# EAGLE board counterMeter (EAGLE 6.4)
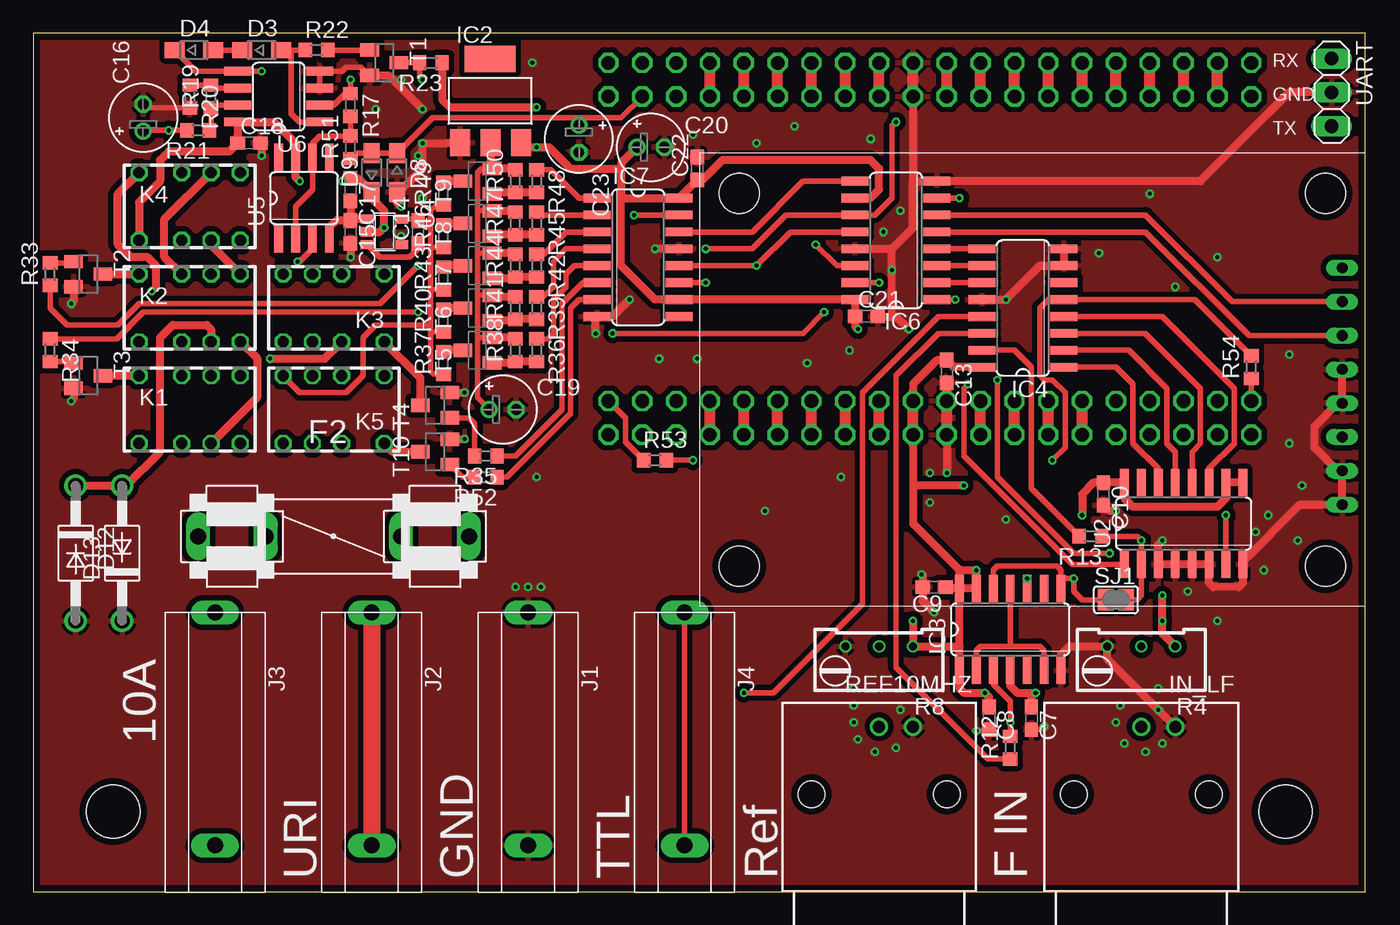
[diagram p0: board, top side]
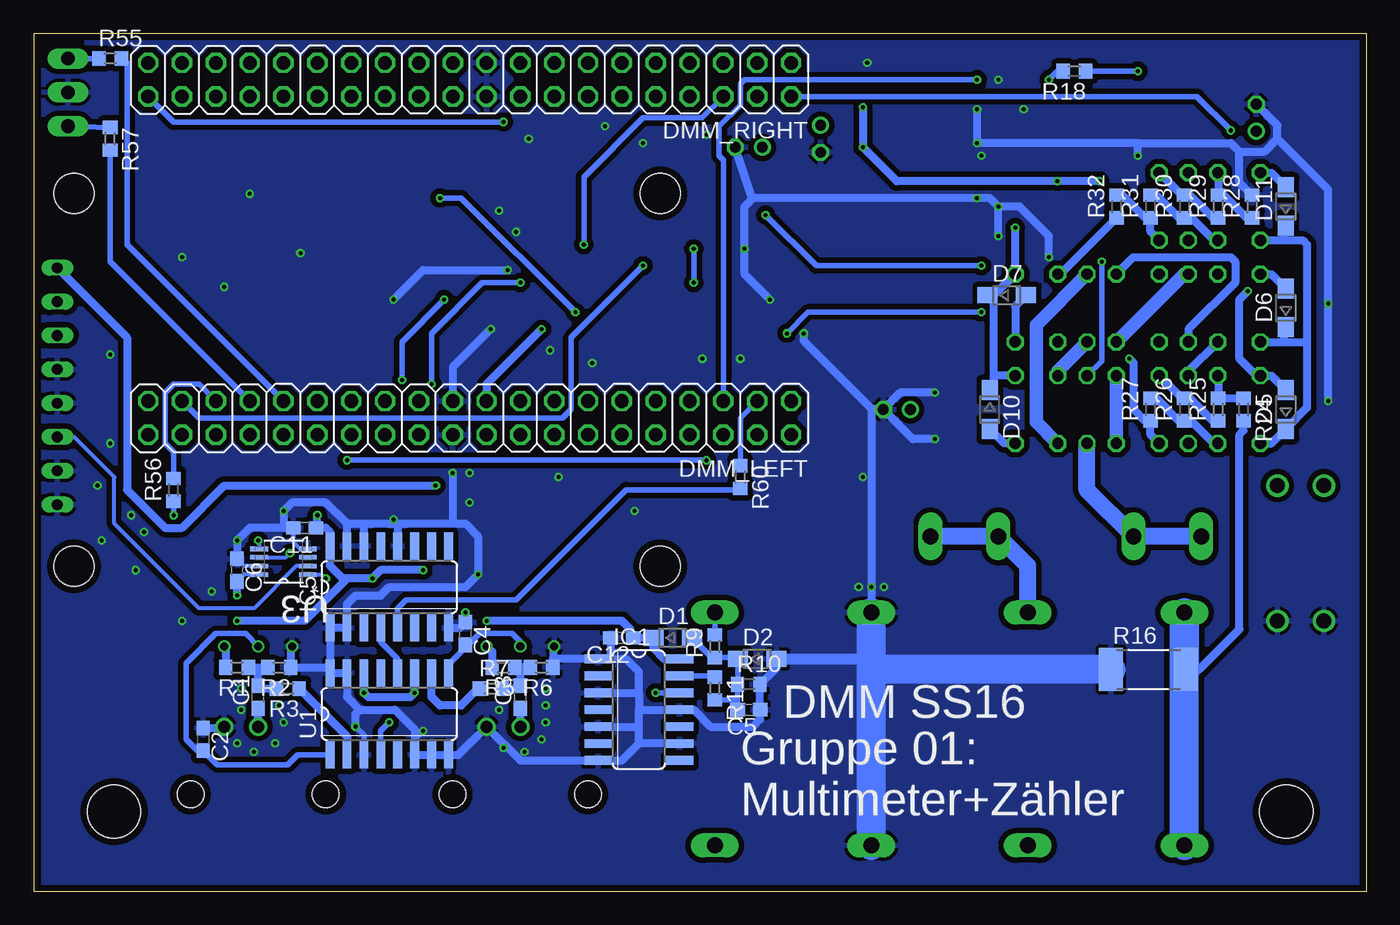
[diagram p1: board, bottom side, seen from below]

Size 100 x 64.44 mm. Coordinates in mm from the lower left corner, seen from the top.
Outline: 0,0 100,0 100,64.44 0,64.44 0,0
Copper layers (1*16): Top 0.035mm / dielectric 1.6mm / Bottom 0.035mm
Design rules "Elecrow_2-layer_PCB_eagle_rule": minimum track width 6mil, minimum drill 0.3mm, track to track 6mil, track to pad 6mil, pad to pad 6mil, via to via 8mil, smd to smd 0mil, copper to edge 20mil, drill to drill 10mil, minimum pad ring 6mil, minimum via ring 6mil, stop-mask expansion 0mil, vias tented up to drill 100mil, thermal gap 10mil
Holes 4 mm at 6,6 94,6

## Footprints (pad centres in the part's own frame; a part is rotated, then mirrored left to right if it is on the bottom)
C0603 = smd 1.1 x 1: 1 -0.85,0; 2 0.85,0
E2-5 = drill 0.813 pad 1.27: + -1.016,0 | drill 0.813 pad 1.27 octagon: - 1.016,0
SOD323-W = smd 1.5 x 1.2: A 1.45,0; C -1.45,0
DO41-10 = drill 1.118: A 5.08,0; C -5.08,0
2X20 = drill 1.016 octagon: 1 -24.13,-1.27; 2 -24.13,1.27; 3 -21.59,-1.27; 4 -21.59,1.27; 5 -19.05,-1.27; 6 -19.05,1.27; 7 -16.51,-1.27; 8 -16.51,1.27; 9 -13.97,-1.27; 10 -13.97,1.27; 11 -11.43,-1.27; 12 -11.43,1.27; 13 -8.89,-1.27; 14 -8.89,1.27; 15 -6.35,-1.27; 16 -6.35,1.27; 17 -3.81,-1.27; 18 -3.81,1.27; 19 -1.27,-1.27; 20 -1.27,1.27; 21 1.27,-1.27; 22 1.27,1.27; 23 3.81,-1.27; 24 3.81,1.27; 25 6.35,-1.27; 26 6.35,1.27; 27 8.89,-1.27; 28 8.89,1.27; 29 11.43,-1.27; 30 11.43,1.27; 31 13.97,-1.27; 32 13.97,1.27; 33 16.51,-1.27; 34 16.51,1.27; 35 19.05,-1.27; 36 19.05,1.27; 37 21.59,-1.27; 38 21.59,1.27; 39 24.13,-1.27; 40 24.13,1.27
FUSE1 = drill 1.194 long: 1A -10.16,0; 1B -5.08,0; 2A 10.16,0; 2B 5.08,0
SO14 = smd 0.66 x 2.032: 1 -3.81,-3.073; 2 -2.54,-3.073; 3 -1.27,-3.073; 4 0,-3.073; 5 1.27,-3.073; 6 2.54,-3.073; 7 3.81,-3.073; 8 3.81,3.073; 9 2.54,3.073; 10 1.27,3.073; 11 0,3.073; 12 -1.27,3.073; 13 -2.54,3.073; 14 -3.81,3.073
SOT223 = smd 1.499 x 2.007: 1 -2.261,-3.15; 2 0.025,-3.15; 3 2.311,-3.15 | smd 3.81 x 2.007: 4 0,3.15
SO16 = smd 0.66 x 2.032: 1 -4.445,-3.073; 2 -3.175,-3.073; 3 -1.905,-3.073; 4 -0.635,-3.073; 5 0.635,-3.073; 6 1.905,-3.073; 7 3.175,-3.073; 8 4.445,-3.073; 9 4.445,3.073; 10 3.175,3.073; 11 1.905,3.073; 12 0.635,3.073; 13 -0.635,3.073; 14 -1.905,3.073; 15 -3.175,3.073; 16 -4.445,3.073
AMP_227161 = drill 0.9 pad 1.27: 1 0,-5.08; 2 -2.54,-5.08 | hole 2: -5.08,0; 5.08,0
4MMJACK = drill 1.2 long: 1@1 0,0; 1@2 17.5,0
G6K-2P-Y = drill 0.85 octagon: 1 0,-2.54; 2 3.2,-2.54; 3 5.4,-2.54; 4 7.6,-2.54; 5 7.6,2.54; 6 5.4,2.54; 7 3.2,2.54; 8 0,2.54
HFFRONT = drill 0.8 long: DIVSEL1 48.26,22.86; DIVSEL2 48.26,20.32; GND1 48.26,17.78; GND2 48.26,15.24; GND3 48.26,10.16; GND4 48.26,7.62; OUT 48.26,12.7; VCC 48.26,25.4 | hole 3: 3,31; 3,3; 47,3; 47,31
R0603 = smd 1 x 1.1: 1 -0.85,0; 2 0.85,0
RTRIM64W = drill 0.61: 1 1.27,-2.54; 2 1.27,0; 3 1.27,2.54
R2512 = smd 1.8 x 3.2: 1 -2.8,0; 2 2.8,0
SJ = smd 1.168 x 1.6: 1 -0.762,0; 2 0.762,0
SOT23 = smd 1 x 1.4: 1 -0.95,-1.1; 2 0.95,-1.1; 3 0,1.1
SOT23-BEC = smd 1 x 1.4: B -0.95,-1.1; C 0,1.1; E 0.95,-1.1
SOIC16 = smd 0.66 x 2.032: 1 -4.445,-3.073; 2 -3.175,-3.073; 3 -1.905,-3.073; 4 -0.635,-3.073; 5 0.635,-3.073; 6 1.905,-3.073; 7 3.175,-3.073; 8 4.445,-3.073; 9 4.445,3.073; 10 3.175,3.073; 11 1.905,3.073; 12 0.635,3.073; 13 -0.635,3.073; 14 -1.905,3.073; 15 -3.175,3.073; 16 -4.445,3.073
SOP65P400X130-8N = smd 1.321 x 0.356: 1 -1.829,0.965; 2 -1.829,0.33; 3 -1.829,-0.33; 4 -1.829,-0.965; 5 1.829,-0.965; 6 1.829,-0.33; 7 1.829,0.33; 8 1.829,0.965
SOT23-5 = smd 0.69 x 0.99: 1 -0.95,-1.29; 2 0,-1.29; 3 0.95,-1.29; 4 0.95,1.3; 5 -0.95,1.3
SOIC8 = smd 0.66 x 2.032: 1 -1.905,-3.073; 2 -0.635,-3.073; 3 0.635,-3.073; 4 1.905,-3.073; 5 1.905,3.073; 6 0.635,3.073; 7 -0.635,3.073; 8 -1.905,3.073
1X03 = drill 1.016 long: 1 -2.54,0; 2 0,0; 3 2.54,0

## Placement (x,y rotation side)
C1  1µ  [C0603]  83.19,14.61 90 bottom
C2  1µ  [C0603]  87.31,11.43 270 bottom
C3  1µ  [C0603]  63.5,14.61 90 bottom
C4  1µ  [C0603]  67.63,19.37 270 bottom
C5  15p  [C0603]  46.35,13.65 180 bottom
C6  100n  [C0603]  84.77,24.13 270 bottom
C7  100n  [C0603]  74.93,13.02 270 top
C8  100n  [C0603]  71.75,13.02 270 top
C9  100n  [C0603]  67.63,22.86 180 top
C10  100n  [C0603]  80.33,29.84 270 top
C11  100n  [C0603]  79.69,27.3 180 bottom
C12  100n  [C0603]  55.88,19.05 180 bottom
C13  100n  [C0603]  68.58,39.05 270 top
C14  1µ  [C0603]  28.89,49.53 90 top
C15  1µ  [C0603]  23.81,49.53 270 top
C16  10µ  [E2-5]  8.26,58.1 90 top
C17  100n  [C0603]  23.81,52.7 270 top
C18  100n  [C0603]  16.19,56.2 0 top
C19  10µ  [E2-5]  35.24,36.2 0 top
C20  10µ  [E2-5]  46.35,55.88 0 top
C21  100n  [C0603]  62.55,43.18 0 top
C22  100n  [C0603]  49.85,54.29 90 top
C23  10µ  [E2-5]  40.96,56.52 270 top
D1  4148  [SOD323-W]  52.07,19.05 0 bottom
D2  4148  [SOD323-W]  45.72,17.46 0 bottom
D3  4148  [SOD323-W]  17.14,63.18 0 top
D4  4148  [SOD323-W]  12.06,63.18 0 top
D5  4148  [SOD323-W]  6.03,36.2 90 bottom
D6  4148  [SOD323-W]  6.03,43.81 90 bottom
D7  4148  [SOD323-W]  26.99,44.77 0 bottom
D8  4148  [SOD323-W]  27.3,53.98 270 top
D9  4148  [SOD323-W]  25.4,53.98 90 top
D10  4148  [SOD323-W]  28.26,36.2 270 bottom
D11  4148  [SOD323-W]  6.03,51.44 90 bottom
D12  1N4001  [DO41-10]  3.17,25.4 270 top
D13  1N4001  [DO41-10]  6.67,25.4 90 top
DMM_LEFT  [2X20]  67.31,35.56 180 bottom
DMM_RIGHT  [2X20]  67.31,60.96 180 bottom
F2  315mA  [FUSE1]  22.54,26.67 0 top
IC1  74AC14D  [SO14]  54.61,13.65 270 bottom
IC2  REG1117  [SOT223]  34.29,59.37 0 top
IC3  74AC74D  [SO14]  73.34,19.68 0 top
IC4  74HC151D  [SO16]  74.3,43.81 90 top
IC5  74AC390D  [SO16]  73.34,22.86 0 bottom
IC6  74HC595D  [SO16]  64.77,48.9 90 top
IC7  74HC595D  [SO16]  45.4,47.62 270 top
IN_LF  1-227161-6  [AMP_227161]  83.19,7.3 180 top
J1  COMMON  [4MMJACK]  37.15,20.95 270 top
J2  U/I/R  [4MMJACK]  25.4,20.95 270 top
J3  10A  [4MMJACK]  13.65,20.95 270 top
J4  U/I/R  [4MMJACK]  48.9,20.95 270 top
K1  G6K-2P-Y  [G6K-2P-Y]  7.94,36.2 0 top
K2  G6K-2P-Y  [G6K-2P-Y]  7.94,43.81 0 top
K3  G6K-2P-Y  [G6K-2P-Y]  26.35,43.81 180 top
K4  G6K-2P-Y  [G6K-2P-Y]  7.94,51.44 0 top
K5  G6K-2P-Y  [G6K-2P-Y]  26.35,36.2 180 top
PCB1  HFFRONT  [HFFRONT]  50.01,21.43 0 top
R1  100  [R0603]  84.77,16.83 180 bottom
R2  100  [R0603]  81.6,16.83 180 bottom
R3  330  [R0603]  80.96,15.24 180 bottom
R4  10k  [RTRIM64W]  83.19,17.14 90 top
R5  100  [R0603]  64.77,16.83 180 bottom
R6  100  [R0603]  61.91,16.83 180 bottom
R7  330  [R0603]  65.72,15.24 0 bottom
R8  10k  [RTRIM64W]  63.5,17.14 90 top
R9  10k  [R0603]  48.9,18.41 90 bottom
R10  1M  [R0603]  46.35,15.56 0 bottom
R11  330  [R0603]  48.9,15.24 270 bottom
R12  10k  [R0603]  73.34,10.79 90 top
R13  10k  [R0603]  79.38,26.67 180 top
R16  0.02  [R2512]  16.36,16.68 0 bottom
R17  10k  [R0603]  23.81,59.05 270 top
R18  10k  [R0603]  21.91,61.59 180 bottom
R19  140k  [R0603]  13.34,59.69 90 top
R20  10k  [R0603]  11.75,59.69 270 top
R21  10k  [R0603]  12.38,57.15 180 top
R22  1k  [R0603]  21.27,63.18 0 top
R23  10k  [R0603]  29.84,62.23 180 top
R24  1  [R0603]  9.21,36.2 270 bottom
R25  9  [R0603]  11.11,36.2 90 bottom
R26  90  [R0603]  13.65,36.2 90 bottom
R27  900  [R0603]  16.19,36.2 90 bottom
R28  4k  [R0603]  8.57,51.44 90 bottom
R29  6k  [R0603]  11.11,51.44 90 bottom
R30  90k  [R0603]  13.65,51.44 90 bottom
R31  900k  [R0603]  16.19,51.44 90 bottom
R32  9M  [R0603]  18.73,51.44 90 bottom
R33  10k  [R0603]  1.27,46.35 90 top
R34  10k  [R0603]  1.27,40.64 270 top
R35  10k  [R0603]  33.97,32.7 180 top
R36  1k  [R0603]  37.78,40.64 270 top
R37  100  [R0603]  30.8,39.69 90 top
R38  10k  [R0603]  36.2,40.64 90 top
R39  1k  [R0603]  37.78,43.81 270 top
R40  1k  [R0603]  30.8,42.86 90 top
R41  10k  [R0603]  36.2,43.81 90 top
R42  1k  [R0603]  37.78,46.99 270 top
R43  10k  [R0603]  30.8,46.04 90 top
R44  10k  [R0603]  36.2,46.99 90 top
R45  1k  [R0603]  37.78,50.16 270 top
R46  100k  [R0603]  30.8,49.21 90 top
R47  10k  [R0603]  36.2,50.16 90 top
R48  1k  [R0603]  37.78,53.34 270 top
R49  1M  [R0603]  30.8,52.39 90 top
R50  10k  [R0603]  36.2,53.34 90 top
R51  10k  [R0603]  23.81,55.88 90 top
R52  10k  [R0603]  33.97,31.11 180 top
R53  100  [R0603]  46.67,32.38 0 top
R54  100  [R0603]  91.44,39.37 90 top
R55  100  [R0603]  94.3,62.55 0 bottom
R56  100  [R0603]  89.53,30.16 90 bottom
R57  100  [R0603]  94.3,56.52 270 bottom
R60  100  [R0603]  46.99,31.11 270 bottom
REF10MHZ  1-227161-6  [AMP_227161]  63.5,7.3 180 top
SJ1  [SJ]  81.28,21.91 0 top
T1  BC847  [SOT23]  26.35,62.23 270 top
T2  BC847  [SOT23]  4.13,46.35 270 top
T3  BC847  [SOT23]  4.13,38.73 270 top
T4  BC847  [SOT23]  30.16,36.51 90 top
T5  BC857  [SOT23-BEC]  33.34,40.64 90 top
T6  BC857  [SOT23-BEC]  33.34,43.81 90 top
T7  BC857  [SOT23-BEC]  33.34,46.99 90 top
T8  BC857  [SOT23-BEC]  33.34,50.16 90 top
T9  BC857  [SOT23-BEC]  33.34,53.34 90 top
T10  BC847  [SOT23]  30.16,33.02 90 top
U1  MAX9201  [SOIC16]  73.34,13.34 0 bottom
U2  74XX161  [SOIC16]  86.36,27.62 0 top
U3  SN74LVC2G157DCTR  [SOP65P400X130-8N]  81.28,24.77 180 bottom
U4  MAX871  [SOT23-5]  26.35,49.53 270 top
U5  AD8638  [SOIC8]  20.32,52.07 0 top
U6  AD8539  [SOIC8]  18.41,59.69 90 top
UART  [1X03]  97.47,60.01 270 top

## Library data of the parts
C1-C23 = rcl
D1-D13 = diode
DMM_LEFT DMM_RIGHT UART = pinhead
F2 = special
IC1 IC3-IC7 = 74xx-eu
IC2 = burr-brown; MPN: REG1117; OC_FARNELL: 1097566; OC_NEWARK: 14P6981
IN_LF REF10MHZ = con-coax; MF: TYCO ELECTRONICS; MPN: 1-227161-6; OC_FARNELL: unknown; OC_NEWARK: 09H7854
J1-J4 PCB1 U1 U2 U4-U6 = dmm
K1-K5 = relay; MF: OMRON COMPONENTS USA; MPN: G6K-2P-Y DC12; OC_FARNELL: 3937276; OC_NEWARK: 34C3464
R1-R13 R16-R57 R60 = resistor
SJ1 = jumper
T1-T10 = transistor
U3 = dmm; MPN: SN74LVC2G157DCTR; OC_FARNELL: 1287414; OC_NEWARK: 76C4205; PACKAGE: SOP-8; SUPPLIER: Texas Instruments

## Nets
+3V3: C19.+ IC2.2 R38.2 R41.2 R44.2 R47.2 R50.2 T5.E T6.E T7.E T8.E T9.E
-5V: C15.1 C17.2 U4.1 U5.4
AREF: DMM_RIGHT.17 DMM_RIGHT.18
AVCC: DMM_RIGHT.21 DMM_RIGHT.22
CNT_EN: R56.1 U2.7
CNT_IN: R13.1 SJ1.2 U2.2 U3.5
CNT_IN_: IC4.15 R13.2
CNT_OUT: IC4.5 R53.2 R54.2
CNT_RES: IC6.15 U2.1
DIVSEL1: IC4.11 IC6.2
DIVSEL2: IC4.10 IC6.3
DIVSEL3: IC4.9 IC6.4
GND: C2.1 C4.1 C5.1 C6.1 C7.2 C8.2 C9.2 C10.2 C11.2 C12.2 C13.2 C15.2 C16.- C18.2 C19.- C20.- C21.2 C22.2 C23.- D2.A D8.A D12.A D13.C DMM_LEFT.21 DMM_LEFT.22 DMM_RIGHT.19 DMM_RIGHT.20 IC1.1 IC1.3 IC1.5 IC1.7 IC1.9 IC1.11 IC2.1 IC3.7 IC4.7 IC4.8 IC4.12 IC5.1 IC5.2 IC5.8 IC5.12 IC5.14 IC5.15 IC6.8 IC6.13 IC7.8 IC7.13 IN_LF.2 J1.1@1 J1.1@2 PCB1.GND1 PCB1.GND2 PCB1.GND3 PCB1.GND4 R2.1 R4.3 R6.1 R8.3 R10.2 R16.1 R20.2 R28.2 REF10MHZ.2 T1.2 T2.2 T3.2 T4.2 T10.2 U1.3 U1.6 U1.7 U1.8 U1.15 U1.16 U2.3 U2.4 U2.5 U2.6 U2.8 U3.4 U3.7 U4.4 U6.3 U6.4 UART.2
HF: PCB1.OUT U3.2
HFSEL1: IC6.6 PCB1.DIVSEL1
HFSEL2: IC6.5 PCB1.DIVSEL2
I_10A: J3.1@1 J3.1@2 R16.2 R24.2
I_IN: D12.C D13.A K2.3 K3.4
I_OUT: K1.4 K3.7 R27.1
I_U/I/R: F2.2A F2.2B J2.1@1 J2.1@2
INPUTSEL: IC6.1 U3.6
LF: IC3.8 IC3.12 SJ1.1 U3.1
LF_DIRECT: IC4.14 R12.1
LF_SIG: IC3.3 R12.2 U1.4
N$1: C2.2 R4.2 U1.1
N$2: R3.1 U1.2
N$3: C1.2 R1.1 R2.2 R3.2
N$4: C1.1 IN_LF.1
N$5: C4.2 R8.2 U1.9
N$6: R7.1 U1.10
N$7: C3.2 R5.1 R6.2 R7.2
N$8: C3.1 REF10MHZ.1
N$9: J4.1@1 J4.1@2 R9.2
N$10: C5.2 D1.A D2.C R9.1 R10.1 R11.2
N$11: IC1.13 R11.1
N$12: K4.7 R28.1 R29.2
N$13: IC5.4 U1.12
N$14: IC4.1 U2.14
N$15: K1.3 K2.4
N$16: IC4.2 U2.13
N$17: IC4.3 U2.12
N$18: IC4.4 U2.11
N$19: F2.1A F2.1B K5.6
N$24: C14.2 U4.5
N$25: C14.1 U4.3
N$26: D3.A R22.1 U6.1
N$27: D4.C R18.1 U6.5
N$28: R19.2 R20.1 U6.6
N$29: IC6.9 IC7.14
N$30: R17.1 R18.2 U6.2
N$31: R17.2 R51.2 U5.2 U5.6
N$32: D3.C D4.A
N$33: R22.2 T1.1
N$34: K1.7 R24.1 R25.2
N$35: K1.5 R25.1 R26.2
N$36: K1.2 R26.1 R27.2
N$37: K1.6 K2.2
N$38: K4.5 R29.1 R30.2
N$39: K4.2 R30.1 R31.2
N$40: K4.4 R31.1 R32.2
N$41: K2.5 K4.3
N$42: K2.7 K4.6
N$43: D6.A K2.8 T2.3
N$44: R33.2 T2.1
N$45: D5.A D11.A K1.8 K4.8 T3.3
N$46: R34.2 T3.1
N$47: R35.2 T4.1
N$48: D7.A K3.8 T4.3
N$49: R36.2 R38.1 T5.B
N$50: R37.2 T5.C
N$51: K3.3 K5.7
N$52: IC3.2 IC3.6 IC3.11
N$53: R39.2 R41.1 T6.B
N$54: R40.2 T6.C
N$56: R42.2 R44.1 T7.B
N$57: R43.2 T7.C
N$59: R45.2 R47.1 T8.B
N$60: R46.2 T8.C
N$62: R48.2 R50.1 T9.B
N$63: R49.2 T9.C
N$65: K5.4 K5.5 R37.1 R40.1 R43.1 R46.1 R49.1
N$66: R52.2 T10.1
N$67: D10.A K5.8 T10.3
PA0: C16.+ DMM_RIGHT.2 R21.2
PA1: C23.+ D8.C D9.A DMM_RIGHT.4 R51.1
PA2: DMM_RIGHT.6 IC6.14
PA3: DMM_RIGHT.7 DMM_RIGHT.8
PA4: DMM_RIGHT.9 DMM_RIGHT.10
PA5: DMM_RIGHT.11 DMM_RIGHT.12
PA6: DMM_RIGHT.13 DMM_RIGHT.14
PA7: DMM_RIGHT.15 DMM_RIGHT.16
PB0: DMM_LEFT.1 R53.1
PB1: DMM_LEFT.3 R60.1
PB2: DMM_LEFT.5 R23.2 T1.3
PB3: DMM_LEFT.7 DMM_LEFT.8
PB4: DMM_LEFT.9 DMM_LEFT.10
PB5: DMM_LEFT.11 DMM_LEFT.12
PB6: DMM_LEFT.13 DMM_LEFT.14
PB7: DMM_LEFT.15 DMM_LEFT.16
PC0: DMM_RIGHT.37 DMM_RIGHT.38
PC1: DMM_RIGHT.35 DMM_RIGHT.36
PC2: DMM_RIGHT.33 DMM_RIGHT.34
PC3: DMM_RIGHT.31 DMM_RIGHT.32
PC4: DMM_RIGHT.29 DMM_RIGHT.30
PC5: DMM_RIGHT.27 DMM_RIGHT.28
PC6: DMM_RIGHT.25 DMM_RIGHT.26
PC7: DMM_RIGHT.23 DMM_RIGHT.24
PD0: DMM_LEFT.27 DMM_LEFT.28
PD1: DMM_LEFT.29 DMM_LEFT.30
PD2: DMM_LEFT.31 R55.2
PD3: DMM_LEFT.33 R57.2
PD4: DMM_LEFT.35 R56.2
PD5: DMM_LEFT.37 IC6.12 IC7.12
PD6: DMM_LEFT.39 R54.1
PD7: DMM_RIGHT.40 IC6.11 IC7.11
R_RANGE1: IC7.5 R36.1
R_RANGE2: IC7.4 R39.1
R_RANGE3: IC7.3 R42.1
R_RANGE4: IC7.2 R45.1
R_RANGE5: IC7.1 R48.1
R_SELECTOR: IC7.7 R52.1
RANGE_LSB: IC6.7 R34.1
RANGE_MSB: IC7.15 R33.1
REF: IC5.5 R60.2
RESET: DMM_LEFT.17 DMM_LEFT.18
RX: R55.1 UART.1
TTL: IC1.12 IC4.13
TX: R57.1 UART.3
U_I_OUT: R19.1 R21.1 U6.7
U_I_R_RAW: K5.3 U5.3
U_I_RAW: K3.6 K5.2
U_I_SELECTOR: IC7.6 R35.1
U_IN: K3.2 R32.1
U_OUT: K2.6 K3.5
VCC: C6.2 C7.1 C8.1 C9.1 C10.1 C11.1 C12.1 C13.1 C17.1 C18.1 C20.+ C21.1 C22.1 D1.C D5.C D6.C D7.C D9.C D10.C D11.C DMM_LEFT.19 DMM_LEFT.20 IC1.14 IC2.3 IC3.1 IC3.4 IC3.10 IC3.13 IC3.14 IC4.16 IC5.16 IC6.10 IC6.16 IC7.10 IC7.16 K1.1 K2.1 K3.1 K4.1 K5.1 PCB1.VCC R1.2 R4.1 R5.2 R8.1 R23.1 U1.11 U1.14 U2.9 U2.10 U2.16 U3.8 U4.2 U5.7 U6.8
XTAL1: DMM_LEFT.25 DMM_LEFT.26
XTAL2: DMM_LEFT.23 DMM_LEFT.24

## Tracks (layer width: path | path; a pad name or v marks a point on that pad's centre or on a via)
+3V3
  Top 0.406: T5.E 33.66,41.59 33.34,41.59 | 33.34,41.59 33.34,44.77 | 33.34,44.77 33.34,47.94 | 33.34,47.94 33.34,51.12 | 33.34,51.12 33.34,53.98 33.66,54.29 T9.E | T8.E 33.34,51.12 | 36.09,47.94 33.34,47.94 | 34.54,44.66 T6.E 33.34,44.77 | C19.+ 33.34,37.08 33.34,41.59
  Top 0.61: IC2.2 34.31,54.41 T9.E 36.09,54.29 R50.2 | T8.E 36.09,51.12 R47.2 | R44.2 36.09,47.94 T7.E | T6.E 34.54,44.66 R41.2 | R38.2 36.09,41.59 T5.E
-5V
  Top 0.61: U4.1 23.91,50.48 C15.1 | C17.2 C15.1 | C15.1 22.76,50.38 22.23,49.85 U5.4
AREF
  Top 0.813: DMM_RIGHT.18 DMM_RIGHT.17
AVCC
  Top 0.813: DMM_RIGHT.22 DMM_RIGHT.21
CNT_EN  (via drill 0.3)
  Top 0.406: v89.53,28.26 U2.7
  Bottom 0.406: R56.1 v89.53,28.26
CNT_IN  (via drill 0.3)
  Top 0.406: SJ1.2 82.87,21.91 83.19,22.23 U2.2 v83.19,26.35 82.87,26.67 R13.1
  Bottom 0.305: v83.19,26.35 83.11,26.28 U3.5
CNT_IN_
  Top 0.406: R13.2 74.93,30.27 74.93,39.37 73.66,40.64 IC4.15
CNT_OUT  (via drill 0.3)
  Top 0.406: R54.2 87.21,44.45 IC4.5 76.2,44.45 75.56,43.81 75.56,38.73 75.88,38.42 76.52,38.42 77.47,37.47 77.47,33.34 v76.52,32.38 | v49.53,32.38 R53.2
  Bottom 0.406: v76.52,32.38 v49.53,32.38
CNT_RES  (via drill 0.3)
  Top 0.406: U2.1 78,24.55 69.85,32.7 69.85,37.78 v70.17,38.1 | v63.5,45.72 IC6.15
  Bottom 0.406: v63.5,45.72 66.36,45.72 70.17,41.91 v70.17,38.1
DIVSEL1
  Top 0.406: IC4.11 IC6.2
DIVSEL2
  Top 0.406: IC4.10 IC6.3
DIVSEL3
  Top 0.406: IC4.9 IC6.4
GND  (via drill 0.3)
  Top 0.406: U6.3 U6.4 23.18,61.59 23.5,61.91 24.62,61.91 T1.2 | R20.2 8.53,58.84 C16.- | v70.8,12.06 71.65,12.06 C8.2 | v75.88,12.38 75.67,12.17 C7.2 | IC6.13 61.59,48.26
  Top 0.61: IC3.7 77.15,17.78 77.79,18.41 R4.3 80.64,17.46 IN_LF.2 | v67.63,20.95 66.78,21.8 C9.2 66.78,23.71 v66.67,23.81 | C10.2 80.75,28.57 v81.28,28.57 | v84.77,26.35 84.45,26.04 U2.3 U2.4 U2.5 U2.6 88.27,23.18 88.58,22.86 90.49,22.86 90.81,23.18 U2.8 90.81,24.77 95.09,29.05 PCB1.GND4 PCB1.GND3 97.95,31.59 96.2,33.34 96.2,34.92 97.95,36.67 PCB1.GND2 PCB1.GND1 | IC4.8 IC4.7 75.56,46.99 v73.03,44.45 IC4.12 | DMM_RIGHT.20 66.04,53.34 | 66.04,53.34 IC6.8 87.63,53.34 94.3,60.01 UART.2 | IC6.13 64.45,48.26 | 66.04,53.34 66.04,49.85 64.45,48.26 | C21.2 64.45,43.18 | 64.45,43.18 v64.45,46.67 64.45,48.26 | 64.45,43.18 64.77,43.18 v65.72,42.23 | DMM_LEFT.21 C13.2 | DMM_LEFT.22 v68.58,31.43 | C20.- 47.84,55.88 | T4.2 v32.38,37.47 | T10.2 v32.38,33.97 | IC2.1 31.14,56.22 31.11,56.2 v29.21,56.2 29.21,54.29 27.44,52.52 D8.A 27.3,51.75 v27.62,51.44 | U4.4 27.62,48.61 v27.62,49.21 | C15.2 v23.81,47.62 | T1.2 26.35,61.28 26.67,61.28 v29.21,58.74 | C18.2 17.14,56.09 v17.14,55.24 | T2.2 3.03,44.3 v2.86,44.13 | T3.2 3.03,37 v2.86,36.83 | v42.23,41.91 42.23,43.08 IC7.8 43.5,43.18 v44.77,44.45 | IC7.13 v46.67,48.26
  Top 0.813: DMM_LEFT.22 DMM_LEFT.21 | DMM_RIGHT.20 DMM_RIGHT.19
  Bottom 0.305: U3.7 84.23,24.43 C6.1 | C11.2 80.54,26.25 80.02,25.73 U3.4
  Bottom 0.406: U1.6 71.44,11.11 71.44,11.43 v70.8,12.06 | U1.3 75.25,11.75 v75.88,12.38
  Bottom 0.61: R8.3 61.06,18.31 61.06,17.46 | 61.06,17.46 R6.1 | R4.3 80.75,18.31 R2.1 78.11,16.83 77.79,17.14 | IC1.9 54.61,11.11 | 54.61,11.11 54.61,12.38 | 54.61,12.38 54.61,13.65 | 54.61,13.65 IC1.11 50.48,13.65 49.21,12.38 46.04,12.38 45.51,12.91 C5.1 R10.2 44.27,16.79 D2.A | IC1.5 54.61,12.38 | 54.61,11.11 55.88,9.84 IC1.7 63.5,9.84 REF10MHZ.2 68.16,10.26 U1.8 U1.7 U1.6 | 56.83,17.46 IC1.1 61.06,17.46 | 56.83,17.46 55.56,17.46 54.61,16.51 54.61,14.92 | 54.61,14.92 54.61,13.65 | IC1.3 54.61,14.92 | C12.2 56.73,17.57 56.83,17.46 | 75.56,13.65 76.52,14.61 U1.15 U1.16 77.79,17.14 | 75.56,13.65 72.92,13.65 71.44,12.17 71.44,11.11 | 77.79,17.14 IC5.1 IC5.2 76.52,21.59 75.88,22.23 73.98,22.23 73.34,22.86 67.63,22.86 v66.67,23.81 66.67,26.67 67.63,27.62 68.58,27.62 | v75.88,12.38 75.88,13.34 75.56,13.65 | C2.1 85.83,12.28 IN_LF.2 | IC5.8 68.06,19.79 C4.1 v67.63,20.95 | 76.52,27.62 75.25,27.62 | 75.25,27.62 72.71,27.62 | 72.71,27.62 IC5.12 | 72.71,27.62 68.58,27.62 | 81.28,27.3 v81.28,28.57 80.64,29.21 78.11,29.21 76.52,27.62 | 81.28,27.3 C11.2 | C6.1 v84.77,26.35 83.82,27.3 81.28,27.3 | IC5.15 76.52,27.62 | IC5.14 75.25,27.62 | v65.72,42.23 68.58,39.37 DMM_LEFT.21 | v73.03,44.45 70.8,46.67 v64.45,46.67 | v68.58,31.43 68.58,27.62 | C19.- 37.15,36.26 | 37.15,36.26 J1.1@1 | v32.38,37.47 34.99,37.47 C19.- | v32.38,33.97 34.04,33.97 C19.- | v27.62,49.21 v27.62,51.44 | v23.81,47.62 23.81,49.21 26.04,51.44 v27.62,51.44 | v29.21,58.74 v29.21,56.2 17.14,56.2 | v17.14,55.24 17.14,56.2 | 17.14,56.2 10.16,56.2 9.53,55.56 | 9.53,55.56 7.62,55.56 6.67,56.52 | 6.67,56.52 6.67,57.53 C16.- | R28.2 9.53,53.24 9.53,55.56 | 6.67,56.52 2.86,52.7 v2.86,44.13 v2.86,36.83
  Bottom 0.61: 37.15,36.26 42.23,41.34 v42.23,41.91 | v27.62,51.44 28.26,52.07 46.1,52.07 | 46.1,52.07 46.1,52.01 46.67,51.44 v46.67,48.26 46.67,46.35 v44.77,44.45 | 46.1,52.07 C20.-
  Bottom 0.813: D2.A 37.15,17.46
  Bottom 2.184: J1.1@2 37.15,16.83 | 37.15,16.83 37.15,17.46 J1.1@1 | R16.1 36.99,16.68 37.15,16.83
  other vias: 67.31,31.43 67.31,29.21 73.03,27.94 60.64,31.11 54.93,28.57 37.78,31.11 37.15,22.86 36.2,22.86 38.1,22.86 61.59,15.24 61.59,13.97 61.59,12.7 61.91,11.43 63.18,10.48 64.77,10.79 65.09,13.65 84.45,15.24 84.45,13.65 84.77,11.11 83.5,10.48 81.92,11.11 81.28,12.7 81.6,13.97 25.72,58.74 27.62,60.96 29.21,52.07 28.89,55.24 37.47,62.23 49.53,56.83 54.29,56.2 57.15,57.47 62.87,56.52 65.09,51.12 63.82,49.53 61.28,40.64 58.1,39.69 49.85,40.01 46.99,40.01 80.01,47.94 85.72,45.4 88.9,47.62 83.82,52.39 94.3,40.32 94.3,33.66 95.25,30.48 92.71,28.26 91.76,26.99 92.39,24.13 94.93,26.35 88.9,20.32 86.68,22.54
  pour Top (isolate 0.406): -1.59,65.72 101.92,65.72 101.92,-1.91 -1.59,-1.91
  pour Bottom (isolate 0.406): -0.95,65.09 103.82,65.09 103.82,-3.81 -0.95,-3.81
HF
  Bottom 0.305: U3.2 80.34,24.43 83.5,21.27 87.63,21.27 93.98,27.62 93.98,31.11 97,34.13 PCB1.OUT
HFSEL1
  Top 0.406: IC6.6 83.5,50.8 90.01,44.29 PCB1.DIVSEL1
HFSEL2
  Top 0.406: IC6.5 83.5,49.53 91.28,41.75 PCB1.DIVSEL2
I_10A
  Bottom 0.61: R24.2 9.21,34.61 9.53,34.29 9.53,19.68 12.54,16.68 R16.2
  Bottom 2.184: J3.1@2 J3.1@1 13.65,16.77 R16.2
I_IN
  Top 0.61: D12.C D13.A 6.99,30.48 9.53,33.02 9.53,41.59 10.48,42.55 13.02,42.55 13.34,42.23 K2.3
  Bottom 0.61: K3.4 17.48,47.62 10.16,47.62 9.84,47.31 9.84,45.72 13.34,42.23 K2.3
I_OUT  (via drill 0.3)
  Top 0.61: v17.78,40.01 21.88,40.01 K3.7
  Bottom 0.61: K1.4 16.19,34.31 R27.1 16.61,35.34 17.46,36.2 17.46,39.69 v17.78,40.01
I_U/I/R
  Top 1.27: J2.1@1 J2.1@2
  Bottom 1.27: J2.1@1 25.4,24.45 F2.2B F2.2A
INPUTSEL  (via drill 0.3)
  Top 0.406: v80.8,25.4 78.11,25.4 72.39,31.11 v72.39,38.42 | v69.22,44.45 IC6.1
  Bottom 0.305: U3.6 81.11,25.09 v80.8,25.4
  Bottom 0.406: v69.22,44.45 72.39,41.27 v72.39,38.42
LF  (via drill 0.3)
  Top 0.406: IC3.8 77.15,23.5 | 77.15,23.5 77.15,24.13 76.83,24.45 72.39,24.45 72.07,24.13 IC3.12 | 77.15,23.5 v78.11,23.5 78.11,22.54 78.74,21.91 SJ1.1
  Bottom 0.305: U3.1 78.41,23.8 v78.11,23.5
LF_DIRECT
  Top 0.406: R12.1 71.65,9.95 64.77,16.83 64.77,38.73 67.94,41.91 IC4.14
LF_SIG  (via drill 0.3)
  Top 0.406: IC3.3 72.07,15.56 73.34,14.29 v73.34,12.7 R12.2
  Bottom 0.406: U1.4 73.98,12.06 v73.34,12.7
N$1
  Bottom 0.406: R4.2 84.14,19.37 86.36,19.37 88.58,17.14 88.58,11.43 87.73,10.58 C2.2 86.26,9.53 80.96,9.53 80.23,10.26 U1.1
N$2
  Bottom 0.61: R3.1 76.52,11.64 U1.2
N$3
  Bottom 0.61: 83.19,16.83 C1.2 82.97,15.24 R3.2 | 83.19,16.83 R2.2 | R1.1 83.19,16.83
N$4
  Bottom 0.61: IN_LF.1 C1.1
N$5
  Bottom 0.406: U1.9 68.9,17.04 67.63,18.31 C4.2 67.42,18.52 66.57,19.37 64.14,19.37 63.5,18.73 R8.2
N$6
  Bottom 0.61: R7.1 66.67,15.24 67.94,13.97 69.53,13.97 70.17,14.61 U1.10
N$7
  Bottom 0.61: R6.2 R5.1 63.5,16.41 C3.2 63.72,15.24 R7.2
N$8
  Bottom 0.61: REF10MHZ.1 C3.1
N$9
  Top 0.406: J4.1@2 J4.1@1
  Bottom 0.406: J4.1@1 R9.2
N$10
  Bottom 0.406: 47.2,14.29 R10.1 47.17,15.59 D2.C 47.27,17.57 R9.1 49.13,17.57 D1.A | 47.2,14.29 C5.2 | R11.2 47.31,14.39 47.2,14.29
N$11
  Bottom 0.406: IC1.13 49,16.19 R11.1
N$12
  Bottom 0.61: K4.7 11.11,53.95 R29.2 10.69,52.28 8.99,50.59 R28.1
N$13
  Bottom 0.406: U1.12 72.71,17.46 73.98,18.73 IC5.4
N$14
  Top 0.406: U2.14 84.45,31.75 82.55,33.66 82.55,38.1 81.28,39.37 IC4.1
N$15
  Top 0.61: K1.3 16.83,37.15 16.83,40.01 15.56,41.27 K2.4
N$16
  Top 0.406: U2.13 85.72,33.02 85.09,33.66 85.09,37.78 82.23,40.64 IC4.2
N$17
  Top 0.406: U2.12 87,33.02 87.63,33.66 87.63,37.78 83.5,41.91 IC4.3
N$18
  Top 0.406: U2.11 88.27,31.75 90.17,33.66 90.17,37.78 84.77,43.18 IC4.4
N$19
  Bottom 1.27: F2.1A F2.1B 20.95,30.16 K5.6
N$24
  Top 0.406: U4.5 28.79,50.48 C14.2
N$25
  Top 0.406: U4.3 26.02,47.62 28.26,47.62 28.89,48.26 C14.1
N$26
  Top 0.406: U6.1 20,57.78 19.37,58.42 19.37,63.18 | 19.37,63.18 D3.A | R22.1 19.37,63.18
N$27  (via drill 0.3)
  Top 0.406: D4.C 12.2,61.59 U6.5 v17.14,61.59
  Bottom 0.406: R18.1 v17.14,61.59
N$28
  Top 0.406: U6.6 13.55,60.33 R19.2 R20.1
N$29
  Top 0.406: IC7.14 53.98,49.53 57.78,53.34 IC6.9
N$30  (via drill 0.3)
  Top 0.406: U6.2 22.54,59.05 23.39,59.91 R17.1 v23.81,60.96
  Bottom 0.406: R18.2 23.18,61.59 v23.81,60.96
N$31
  Top 0.406: U5.2 19.68,51.44 20.95,52.7 U5.6 20.95,56.2 21.49,56.73 R51.2 R17.2
N$32
  Top 0.406: D3.C D4.A
N$33
  Top 0.406: R22.2 T1.1
N$34
  Bottom 0.61: K1.7 11.11,38.71 R25.2 R24.1
N$35
  Bottom 0.61: R25.1 11.53,35.34 13.23,37.05 R26.2 13.85,37.05 K1.5
N$36
  Bottom 0.61: R27.2 15.77,37.05 14.07,35.34 R26.1 13.12,35.34 11.43,33.66 K1.2
N$37
  Bottom 0.61: K2.2 13.34,39.08 K1.6
N$38
  Bottom 0.61: R29.1 11.53,50.59 13.23,52.28 R30.2 13.85,52.28 K4.5
N$39
  Bottom 0.61: R31.2 15.77,52.28 14.07,50.59 R30.1 13.12,50.59 11.43,48.9 K4.2
N$40
  Bottom 0.61: R32.2 18.31,52.28 16.61,50.59 R31.1 16.19,49.55 K4.4
N$41
  Top 0.61: K2.5 13.34,48.55 K4.3
N$42
  Top 0.61: K2.7 9.84,47.65 9.84,50.48 K4.6
N$43
  Top 0.61: T2.3 K2.8
  Bottom 0.61: K2.8 7.12,46.35 D6.A
N$44
  Top 0.406: T2.1 2.93,47.2 R33.2
N$45  (via drill 0.3)
  Top 0.61: T3.3 K1.8 | v8.89,45.09 9.21,45.4 9.21,46.99 8.57,47.62 7.3,47.62 6.35,48.58 6.35,52.39 K4.8
  Bottom 0.61: D5.A 7.12,38.73 K1.8 8.26,38.73 9.53,40.01 9.53,44.45 v8.89,45.09 | K4.8 7.12,53.98 D11.A
N$46
  Top 0.406: T3.1 2.92,39.79 R34.2
N$47
  Top 0.406: T4.1 32.7,35.56 33.12,35.14 R35.2
N$48
  Top 0.61: T4.3 29.06,38.56 K3.8
  Bottom 0.61: D7.A 26.35,43.95 K3.8
N$49
  Top 0.61: R36.2 R38.1 36.09,39.69 T5.B
N$50
  Top 0.61: T5.C 30.9,40.64 R37.2
N$51
  Bottom 0.61: 23.18,33.66 K5.7
  Bottom 1.016: K3.3 24.77,42.54 24.77,35.24 23.18,33.66
N$52
  Top 0.406: IC3.2 70.8,18.1 71.12,18.41 73.34,18.41 | 73.34,18.41 75.56,18.41 75.88,18.1 IC3.6 | IC3.11 73.34,18.41
N$53
  Top 0.61: R39.2 R41.1 36.09,42.87 T6.B
N$54
  Top 0.61: T6.C 30.9,43.81 R40.2
N$56
  Top 0.61: R42.2 R44.1 36.09,46.04 T7.B
N$57
  Top 0.61: T7.C 30.9,46.99 R43.2
N$59
  Top 0.61: R45.2 R47.1 34.54,49.31 T8.B
N$60
  Top 0.61: T8.C 30.9,50.16 R46.2
N$62
  Top 0.61: R48.2 R50.1 34.54,52.49 T9.B
N$63
  Top 0.61: T9.C 30.9,53.34 R49.2
N$65
  Top 0.406: R37.1 30.06,38.84 29.84,39.05 29.84,41.91 | 29.84,41.91 29.84,42.55 | 29.84,42.55 29.84,45.09 | 29.84,45.09 29.84,48.26 | 29.84,48.26 29.84,51.12 30.27,51.54 R49.1 | R46.1 29.95,48.36 29.84,48.26 | R43.1 29.95,45.19 29.84,45.09 | R40.1 29.95,42.01 29.84,41.91 | K5.4 18.75,38.72 20,37.47 23.5,37.47 24.77,38.73 24.77,41.59 25.72,42.55 29.84,42.55
  Bottom 1.016: K5.5 K5.4
N$66
  Top 0.406: T10.1 32.22,31.11 R52.2
N$67
  Top 0.61: T10.3 26.99,33.02 K5.8
  Bottom 0.61: K5.8 27.17,33.66 D10.A
PA0  (via drill 0.3)
  Top 0.406: C16.+ 8.32,57.15 v10.16,57.15 R21.2
  Bottom 0.406: DMM_RIGHT.2 12.7,59.69 v10.16,57.15
PA1
  Top 0.406: R51.1 24.21,55.42 D9.A D8.C 29.98,58.1 40.96,58.1 | 40.96,58.1 44.13,58.1 DMM_RIGHT.4 | C23.+ 40.96,58.1
PA2  (via drill 0.3)
  Top 0.406: IC6.14 60.33,46.99 v58.74,48.58
  Bottom 0.406: v58.74,48.58 58.74,53.66 54.29,58.1 49.85,58.1 DMM_RIGHT.6
PA3
  Top 0.813: DMM_RIGHT.8 DMM_RIGHT.7
PA4
  Top 0.813: DMM_RIGHT.10 DMM_RIGHT.9
PA5
  Top 0.813: DMM_RIGHT.12 DMM_RIGHT.11
PA6
  Top 0.813: DMM_RIGHT.14 DMM_RIGHT.13
PA7
  Top 0.813: DMM_RIGHT.16 DMM_RIGHT.15
PB0
  Top 0.406: R53.1 44.45,33.76 44.45,35.56 DMM_LEFT.1
PB1
  Bottom 0.406: R60.1 46.99,35.56 DMM_LEFT.3
PB2  (via drill 0.3)
  Top 0.406: T1.3 R23.2 29,61.17 v29.21,60.96
  Bottom 0.406: v29.21,60.96 46.67,60.96 46.99,60.64 46.99,59.05 48.58,57.47 48.58,55.24 48.26,54.93 DMM_LEFT.5
PB3
  Top 0.813: DMM_LEFT.8 DMM_LEFT.7
PB4
  Top 0.813: DMM_LEFT.10 DMM_LEFT.9
PB5
  Top 0.813: DMM_LEFT.12 DMM_LEFT.11
PB6
  Top 0.813: DMM_LEFT.14 DMM_LEFT.13
PB7
  Top 0.813: DMM_LEFT.16 DMM_LEFT.15
PC0
  Top 0.813: DMM_RIGHT.38 DMM_RIGHT.37
PC1
  Top 0.813: DMM_RIGHT.36 DMM_RIGHT.35
PC2
  Top 0.813: DMM_RIGHT.34 DMM_RIGHT.33
PC3
  Top 0.813: DMM_RIGHT.32 DMM_RIGHT.31
PC4
  Top 0.813: DMM_RIGHT.30 DMM_RIGHT.29
PC5
  Top 0.813: DMM_RIGHT.28 DMM_RIGHT.27
PC6
  Top 0.813: DMM_RIGHT.26 DMM_RIGHT.25
PC7
  Top 0.813: DMM_RIGHT.24 DMM_RIGHT.23
PD0
  Top 0.813: DMM_LEFT.28 DMM_LEFT.27
PD1
  Top 0.813: DMM_LEFT.30 DMM_LEFT.29
PD2
  Bottom 0.406: DMM_LEFT.31 93.03,48.58 93.03,62.23 93.34,62.55 R55.2
PD3
  Bottom 0.406: DMM_LEFT.33 94.3,47.31 R57.2
PD4
  Bottom 0.406: R56.2 89.53,33.02 90.17,33.66 90.17,37.47 89.53,38.1 87.63,38.1 DMM_LEFT.35
PD5  (via drill 0.3)
  Top 0.406: IC6.12 56.83,49.53 v54.29,46.99 IC7.12
  Bottom 0.406: DMM_LEFT.37 87.63,35.56 60.33,35.56 59.69,36.2 59.69,41.59 v54.29,46.99
PD6
  Top 0.406: R54.1 DMM_LEFT.39
PD7  (via drill 0.3)
  Top 0.406: v50.48,48.26 53.98,48.26 56.52,50.8 IC6.11 63.18,50.8 64.45,52.07 64.45,57.47 v64.77,57.78 | v50.48,45.72 IC7.11
  Bottom 0.406: v50.48,48.26 v50.48,45.72 | v64.77,57.78 89.53,57.78 DMM_RIGHT.40
R_RANGE1
  Top 0.406: R36.1 38.63,41.49 39.05,41.91 39.05,44.45 40.01,45.4 40.01,46.35 40.64,46.99 IC7.5
R_RANGE2
  Top 0.406: R39.1 38.31,44.66 39.05,45.4 39.05,47.31 40.01,48.26 IC7.4
R_RANGE3
  Top 0.406: R42.1 38.31,47.84 40.01,49.53 IC7.3
R_RANGE4
  Top 0.406: R45.1 38,50.8 IC7.2
R_RANGE5
  Top 0.406: R48.1 38.84,54.19 40.96,52.07 IC7.1
R_SELECTOR
  Top 0.406: IC7.7 40.96,44.45 40.32,43.81 40.32,35.88 35.56,31.11 R52.1
RANGE_LSB  (via drill 0.3)
  Top 0.406: v43.5,41.91 57.78,41.91 v59.37,43.5 | v69.53,52.07 IC6.7 | R34.1 6.25,41.49 8.26,43.5 v28.89,43.5
  Bottom 0.406: v28.89,43.5 41.91,43.5 v43.5,41.91 | v59.37,43.5 67.94,52.07 v69.53,52.07
RANGE_MSB  (via drill 0.3)
  Top 0.406: v28.89,46.99 26.04,44.13 7.94,44.13 6.35,42.55 2.54,42.55 1.27,43.81 R33.1 | v45.09,50.8 IC7.15
  Bottom 0.406: v28.89,46.99 41.27,46.99 v45.09,50.8
REF
  Bottom 0.406: IC5.5 72.71,21.27 72.07,21.91 63.82,21.91 55.56,30.16 47.09,30.16 R60.2
RESET
  Top 0.813: DMM_LEFT.18 DMM_LEFT.17
RX
  Bottom 0.406: R55.1 UART.1
TTL  (via drill 0.3)
  Top 0.406: IC4.13 67.94,43.18 62.23,37.47 62.23,21.59 55.56,14.92 v53.34,14.92
  Bottom 0.406: v53.34,14.92 IC1.12
TX
  Bottom 0.406: R57.1 UART.3
U_I_OUT
  Top 0.406: U6.7 13.55,59.05 R19.1 13.34,57.25 R21.1
U_I_R_RAW  (via drill 0.3)
  Top 0.406: U5.3 20.95,48.26 20,47.31 v19.84,47.31
  Bottom 0.406: K5.3 19.84,39.84 v19.84,47.31
U_I_RAW
  Bottom 1.016: K3.6 23.15,39.08 K5.2
U_I_SELECTOR
  Top 0.406: IC7.6 41.27,45.72 39.69,44.13 39.69,36.2 36.2,32.7 R35.1
U_IN
  Bottom 0.61: R32.1 22.96,46.35 K3.2
U_OUT
  Bottom 1.016: K3.5 13.67,46.35 K2.6
VCC  (via drill 0.3)
  Top 0.61: U4.2 26.04,49.53 v26.35,49.85 26.35,51.12 25.4,52.07 D9.C 24.37,53.55 C17.1 23.6,53.34 v23.18,53.34 | v20,53.34 19.68,53.66 U5.7 19.68,56.2 18.1,57.78 U6.8 15.34,56.72 C18.1 14.71,55.56 10.16,55.56 9.53,54.93 9.53,53.34 7.94,51.75 K4.1 | IC3.4 73.34,15.46 73.88,14.92 v75.25,14.92 74.93,14.61 C7.1 | C8.1 71.75,14.61 v71.44,14.92 69.85,14.92 69.53,15.24 IC3.1 69.53,18.41 | 69.53,18.41 IC3.14 | IC3.14 68.58,22.76 C9.1 | 69.53,18.41 R8.1 v66.04,20.32 | IC3.10 v74.61,23.5 | U2.9 U2.10 89.53,29.53 88.9,28.89 82.55,28.89 81.92,29.53 U2.16 C10.1 79.59,30.7 78.74,29.84 v78.74,28.26 | R4.1 84.77,19.37 v84.77,20.32 v84.77,22.23 | DMM_LEFT.20 66.04,30.48 | 66.04,30.48 66.04,27.62 69.53,24.13 | 69.53,24.13 v70.8,24.13 IC3.13 IC3.14 | 69.53,22.86 69.53,24.13 | v69.85,30.48 66.04,30.48 | IC4.16 69.11,39.37 C13.1 67.84,39.9 66.04,38.1 DMM_LEFT.19 | v61.91,42.23 61.7,42.44 C21.1 IC6.16 IC7.10 46.67,44.45 44.13,46.99 44.13,52.07 | 44.13,52.07 IC7.16 C22.1 | IC6.10 62.87,52.07 63.5,52.7 63.5,54.29 62.87,54.93 51.75,54.93 50.27,53.44 C22.1 | 49.63,53.44 C22.1 | 44.13,54.29 44.13,54.67 C20.+ | 44.13,54.29 44.13,52.07 | IC2.3 36.94,55.88 v37.78,55.88 38.73,55.88 40.32,54.29 44.13,54.29 | R23.1 30.7,59.48 31.27,58.9 v37.78,58.9
  Top 0.813: DMM_LEFT.20 DMM_LEFT.19
  Bottom 0.305: U3.8 84.25,23.8 C6.2
  Bottom 0.61: K2.1 6.17,41.27 | 6.17,41.27 D6.C | K1.1 7.12,33.66 D5.C 4.45,36.33 4.45,41.27 | K4.1 6.17,48.9 | 6.17,48.9 D11.C | v20,53.34 v23.18,53.34 35.24,53.34 v37.78,55.88 v37.78,58.9 | R8.1 65.62,18 R5.2 | R4.1 85.62,18.31 R1.2 | U1.14 v75.25,14.92 74.93,14.61 71.75,14.61 v71.44,14.92 U1.11 | 76.52,23.5 v74.61,23.5 73.98,24.13 v70.8,24.13 | 76.52,23.5 76.83,23.5 77.79,24.45 IC5.16 77.79,26.99 78.11,27.3 C11.1 78.74,27.41 v78.74,28.26 | IC1.14 52.7,17.46 53.52,18.28 D1.C C12.1 55.24,19.27 55.24,19.68 55.88,20.32 v66.04,20.32 | v84.77,22.23 C6.2 | 76.52,23.5 79.69,20.32 v84.77,20.32 | PCB1.VCC 93.03,41.59 93.03,30.16 90.17,27.3 88.9,27.3 85.72,30.48 v69.85,30.48 | v61.91,42.23 66.04,38.1 DMM_LEFT.19 | 6.17,48.9 4.76,48.9 4.45,48.58 4.45,41.27 | 6.17,41.27 4.45,41.27 | v26.35,49.85 K3.1 27.94,44.77 | 27.94,44.77 D7.C | 27.94,38.73 27.94,37.96 D10.C | 27.94,38.73 27.94,44.77 | K5.1 27.94,38.73
XTAL1
  Top 0.813: DMM_LEFT.26 DMM_LEFT.25
XTAL2
  Top 0.813: DMM_LEFT.24 DMM_LEFT.23

## Text on the board
tPlace: RX | GND | TX | 10A | URI | GND | TTL | Ref | F IN
bPlace: DMM SS16 | Gruppe 01: / Multimeter+Zähler